# Altium PCB LPCB226R0.PcbDoc
Units mm, origin at the board's own origin, x right, y up, seen from the top; angles counter-clockwise.
Board outline 81.3 x 68 mm, 2 copper layers (Top Layer, Bottom Layer); 28 components, 6 nets, 77 pads, 60 vias.
Unrouted connection lines stored in the file: 61.
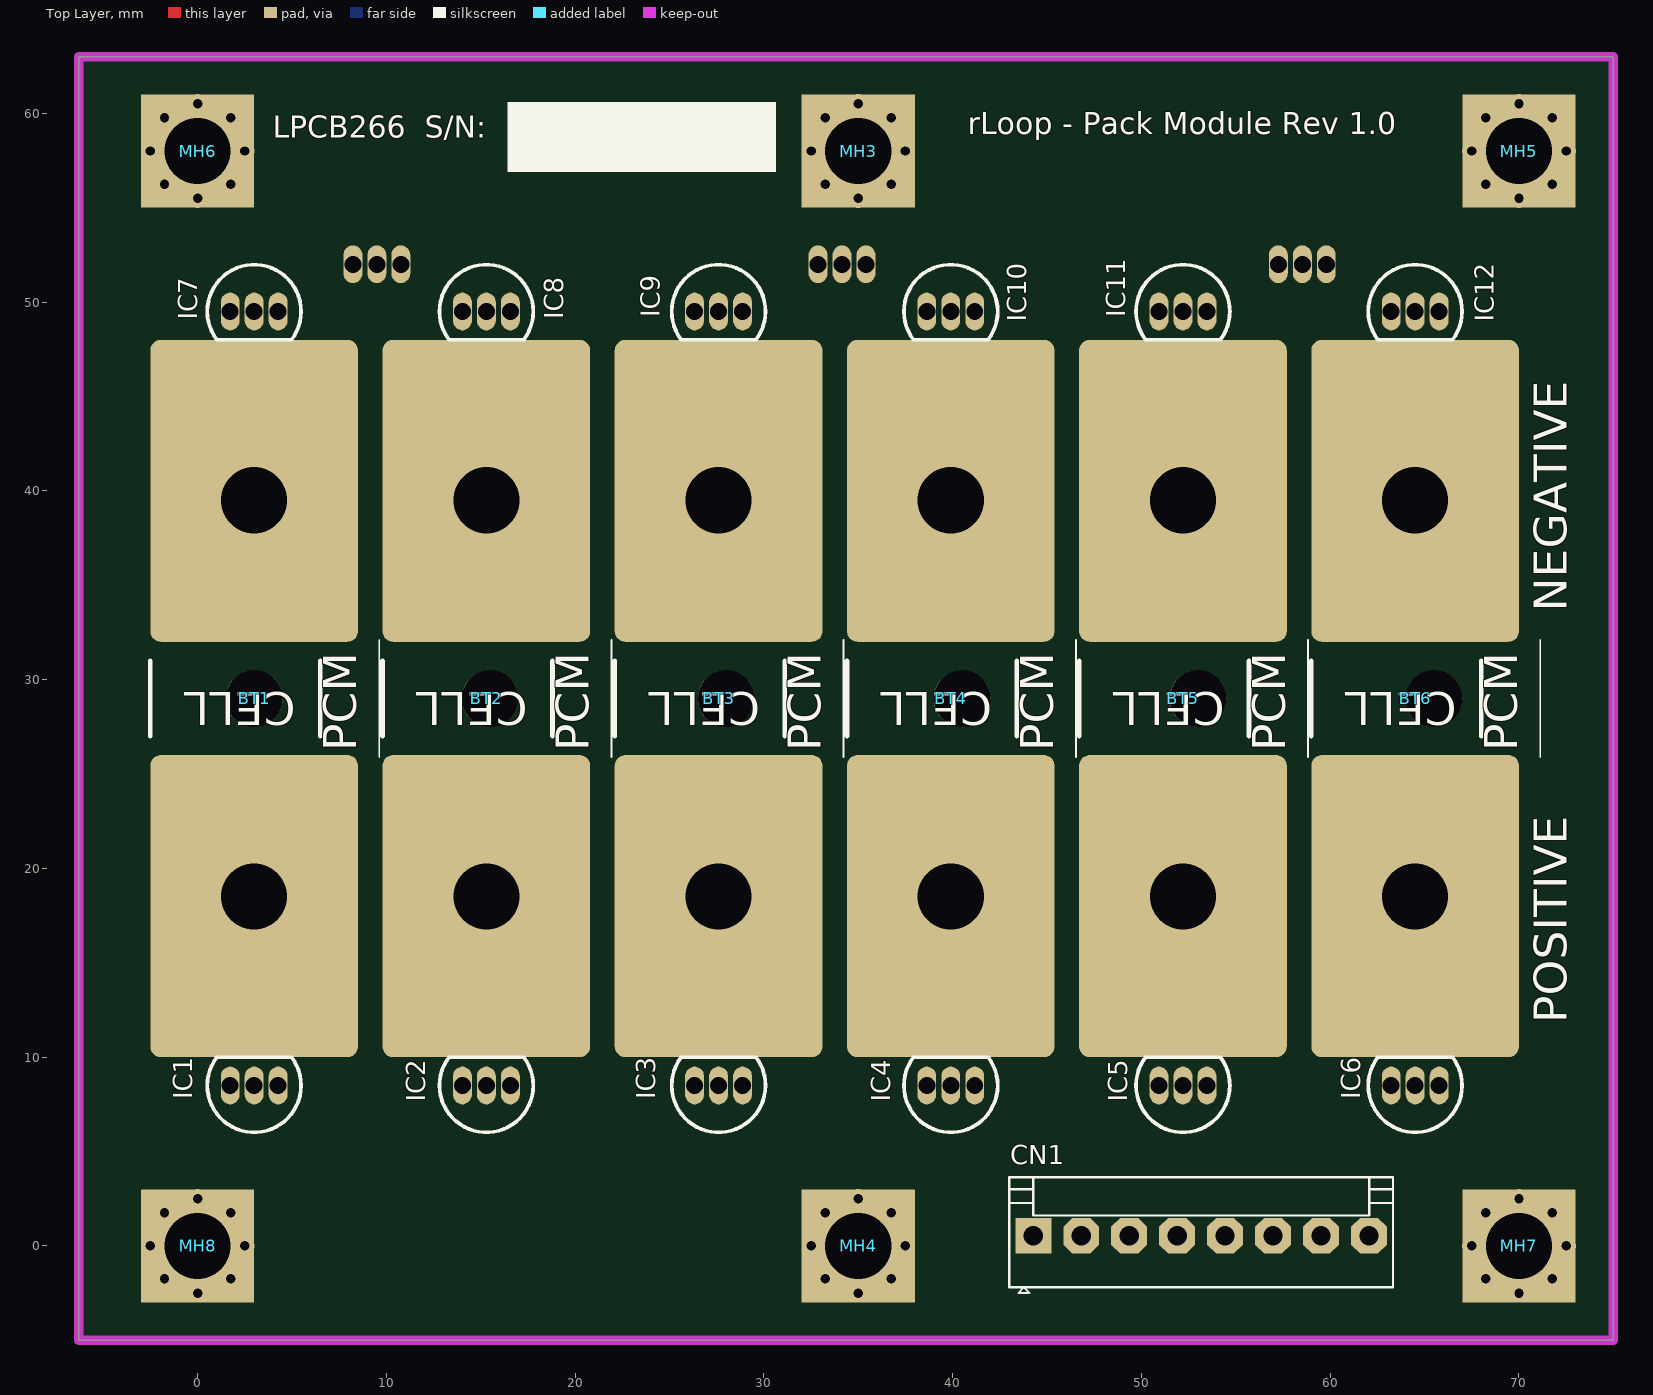
[diagram p0: Top Layer view]
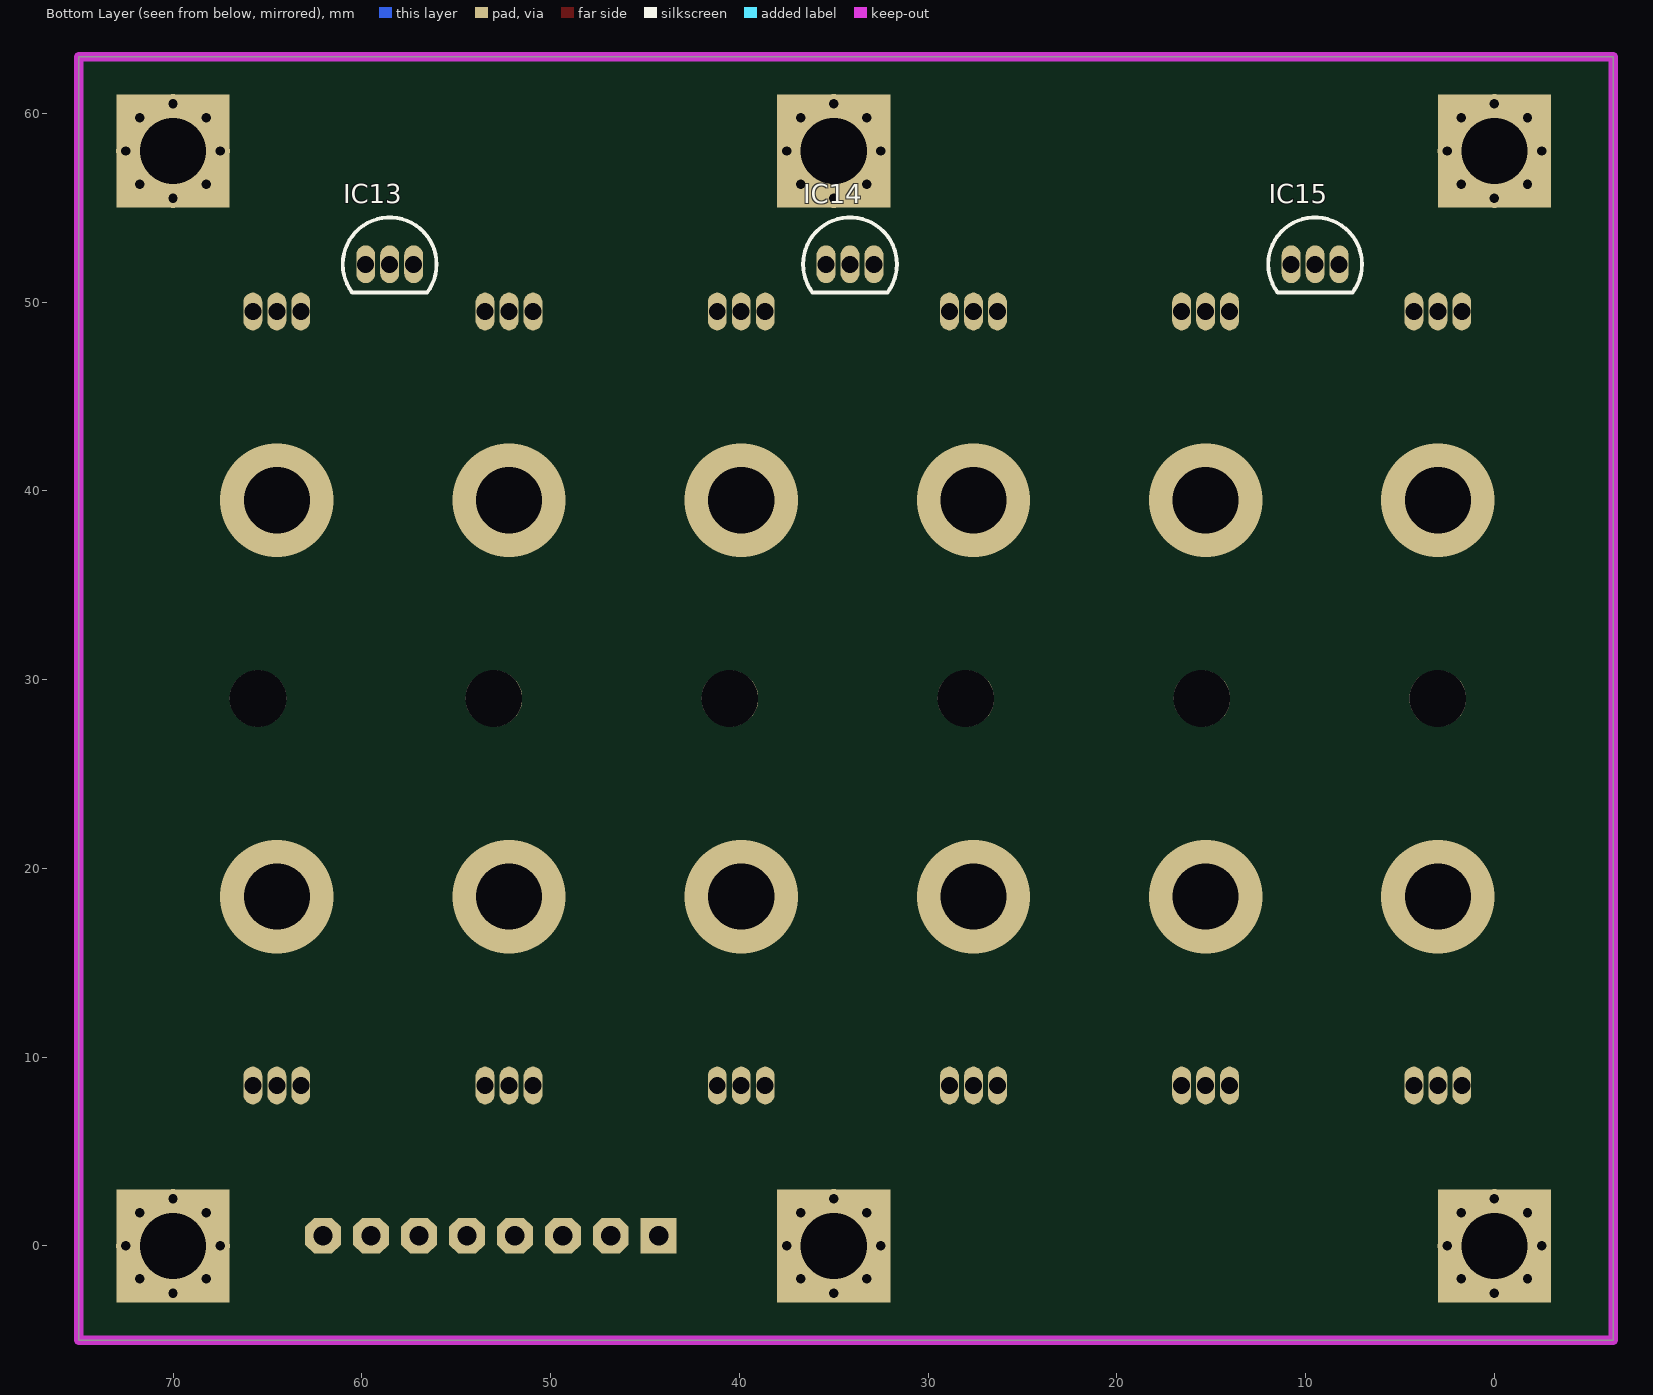
[diagram p1: Bottom Layer view, seen from below]

## Layer stack, top to bottom
Top Layer: signal copper 0.0356
Dielectric: dielectric 0.32, FR-4, Dk 4.8
Bottom Layer: signal copper 0.0356

## Board outline
-6.3,-5 75,-5 75,63 -6.3,63

## Design rules (kind name [scope] priority, off if disabled: settings)
Clearance [All] p1: gap=0.254
PolygonConnect [All] p1: connectstyle=Relief reliefconductorwidth=0.254 reliefentries=4 polygonreliefangle="90 Angle" airgapwidth=0.254
RoomDefinition "LPCB226 - TOP OVERVIEW" [InComponentClass('LPCB226 - TOP OVERVIEW')] p1: confinementstyle=ConfineIn formatcopy=TRUE lockcomponents=FALSE outline -66.976,-65.833 -16.176,-65.833 -16.176,-40.433 -66.976,-40.433
RoutingVias [All] p1: holewidth=0.711 width=1.27 viastyle="Through Hole" minholewidth=0.711 minwidth=1.27 maxholewidth=0.711 maxwidth=1.27
SolderMaskExpansion [All] p1: expansion=0.102
Width [All] p1: maxlimit=0.254 minlimit=0.254 preferedwidth=0.254
28 further rules are at their usual default settings.

## Components (designator, comment, footprint, x,y, rotation, side; value= is the part's Value field where it differs from the comment)
BT1 "YS50001SRL" YS50001SRL 3,29 r90 top
BT2 "YS50001SRL" YS50001SRL 15.3,29 r90 top
BT3 "YS50001SRL" YS50001SRL 27.6,29 r90 top
BT4 "YS50001SRL" YS50001SRL 39.9,29 r90 top
BT5 "YS50001SRL" YS50001SRL 52.2,29 r90 top
BT6 "YS50001SRL" YS50001SRL 64.5,29 r90 top
CN1 "640456-8" 640456-8 53.162,0.538 r0 top locked
IC1 "DS18B20+" TO-92A 3,8.5 r90 top locked
IC2 "DS18B20+" TO-92A 15.3,8.5 r90 top locked
IC3 "DS18B20+" TO-92A 27.6,8.5 r90 top locked
IC4 "DS18B20+" TO-92A 39.9,8.5 r90 top locked
IC5 "DS18B20+" TO-92A 52.2,8.5 r90 top locked
IC6 "DS18B20+" TO-92A 64.5,8.5 r90 top locked
IC7 "DS18B20+" TO-92A 3,49.5 r270 top locked
IC8 "DS18B20+" TO-92A 15.3,49.5 r270 top locked
IC9 "DS18B20+" TO-92A 27.6,49.5 r270 top locked
IC10 "DS18B20+" TO-92A 39.9,49.5 r270 top locked
IC11 "DS18B20+" TO-92A 52.2,49.5 r270 top locked
IC12 "DS18B20+" TO-92A 64.5,49.5 r270 top locked
IC13 "DS18B20+" TO-92A 58.522,52 r270 bottom locked
IC14 "DS18B20+" TO-92A 34.138,52 r270 bottom locked
IC15 "DS18B20+" TO-92A 9.5,52 r270 bottom locked
MH3 "MOUNTING_HOLE_3MM_SQ" MOUNTING_HOLE_3MM_SQ 35,58 r0 top
MH4 "MOUNTING_HOLE_3MM_SQ" MOUNTING_HOLE_3MM_SQ 35,0 r0 top
MH5 "MOUNTING_HOLE_3MM_SQ" MOUNTING_HOLE_3MM_SQ 70,58 r0 top
MH6 "MOUNTING_HOLE_3MM_SQ" MOUNTING_HOLE_3MM_SQ 0,58 r0 top
MH7 "MOUNTING_HOLE_3MM_SQ" MOUNTING_HOLE_3MM_SQ 70,0 r0 top
MH8 "MOUNTING_HOLE_3MM_SQ" MOUNTING_HOLE_3MM_SQ 0,0 r0 top

## Footprints (in the part's own frame and the unit in brackets; to place one, negate y for a bottom-side part, rotate by r counter-clockwise, add the part's x,y. Pads: shape width x height; smd on the part's side, far side on the other; paste and mask are expansions set on the pad)
640456-8 [mm] "Connector, Male Header, 8 Way"
  rect 1.905x1.905 hole 1.02: 1(-8.89,0)
  oct 1.905x1.905 hole 1.02: 2(-6.35,0) 3(-3.81,0) 4(-1.27,0) 5(1.27,0) 6(3.81,0) 7(6.35,0) 8(8.89,0)
  silkscreen extent -10.15,-3.04 10.17,3.1
MOUNTING_HOLE_3MM_SQ [mm] "Non-plated mounting hole for 3mm screw"
  rect 6x6 hole 3.5 mask+0.051: MOUNT(0,0)
TO-92A [mm] "TO, Flat Index; 3 In-Line, Axial Leads; Body Dia. 4.5mm; Leads 0.51 x 0.48 mm (max)"
  oval 2x1 hole 0.9: 1(0,-1.27) 2(0,0) 3(0,1.27)
  silkscreen extent -2.48,-2.48 1.5,2.48
YS50001SRL [mm]
  rrect10% 16x11 smd: N(11,0) P(-11,0)
  silkscreen extent -3.1,-6.63 3.1,5.5

## Part data
BT1 BT2 BT3 BT4 BT5 BT6: "Battery, LiPo"
CN1: "Connector, Male Header, 8 Way"
IC1 IC2 IC3 IC4 IC5 IC6 IC7 IC8 IC9 IC10 IC11 IC12 IC13 IC14 IC15: "IC, Temperature Sensor, 1 Wire, PTH"
MH3 MH4 MH5 MH6 MH7 MH8: "3MM Mouting Hole, Square"

## Free pads (board coordinates)
  round 3 hole 3 unplated: 0(3,29) 0(15.5,29) 0(28,29) 0(40.5,29) 0(53,29) 0(65.5,29)

## Via types
v1: diameter 1.016, hole 0.5, Top Layer to Bottom Layer, tented both sides, 48 vias
v2: diameter 6, hole 3.5, Top Layer to Bottom Layer, 12 vias

## Nets (pads, with @x,y where several pads share a name; then routed paths per layer and width w, separated by ;. In a path a pad name is that pad's centre, name@x,y a point inside that pad or via, vN(x,y) a via of type N, cw(c..) or ccw(c..) an arc to the next point about the centre after c; other vN are vias at no path point)
CHASSIS_GND: MH3.MOUNT MH4.MOUNT MH5.MOUNT MH6.MOUNT MH7.MOUNT MH8.MOUNT
  other v1: 0,-2.5 35,-2.5 70,-2.5 -1.75,-1.75 1.75,-1.75 33.25,-1.75 36.75,-1.75 68.25,-1.75 71.75,-1.75 -2.5,0 2.5,0 32.5,0 37.5,0 67.5,0 72.5,0 -1.75,1.75 1.75,1.75 33.25,1.75 36.75,1.75 68.25,1.75 71.75,1.75 0,2.5 35,2.5 70,2.5 0,55.5 35,55.5 70,55.5 -1.75,56.25 1.75,56.25 33.25,56.25 36.75,56.25 68.25,56.25 71.75,56.25 -2.5,58 2.5,58 32.5,58 37.5,58 67.5,58 72.5,58 -1.75,59.75 1.75,59.75 33.25,59.75 36.75,59.75 68.25,59.75 71.75,59.75 0,60.5 35,60.5 70,60.5
D3V3: CN1.6 IC1.3 IC2.3 IC3.3 IC4.3 IC5.3 IC6.3 IC7.3 IC8.3 IC9.3 IC10.3 IC11.3 IC12.3 IC13.3 IC14.3 IC15.3
DGND: CN1.7 IC1.1 IC2.1 IC3.1 IC4.1 IC5.1 IC6.1 IC7.1 IC8.1 IC9.1 IC10.1 IC11.1 IC12.1 IC13.1 IC14.1 IC15.1
DS_BUS: CN1.8 IC1.2 IC2.2 IC3.2 IC4.2 IC5.2 IC6.2 IC7.2 IC8.2 IC9.2 IC10.2 IC11.2 IC12.2 IC13.2 IC14.2 IC15.2
P3V7: BT1.P BT2.P BT3.P BT4.P BT5.P BT6.P
  other v2: 15.3,18.5 27.6,18.5 39.9,18.5 52.2,18.5 64.5,18.5
PGND: BT1.N BT2.N BT3.N BT4.N BT5.N BT6.N
  other v2: 3,18.5 3,39.5 15.3,39.5 27.6,39.5 39.9,39.5 52.2,39.5 64.5,39.5
pads on no net: CN1.1 CN1.2 CN1.3 CN1.4 CN1.5

## Keep-outs
Keep-Out Layer:
  the board outline again, w0.5

## Silkscreen, mask and mechanical layers (free items; w line width, h text height)
Top Overlay:
  rectangle: 16.427,56.9 30.651,60.583
  text "rLoop - Pack Module Rev 1.0" at 40.8,58.5 h2
  text "LPCB266  S/N:" at 3.981,58.297 h2
  text "NEGATIVE" at 73.1,33.6 h3 r90
  text "POSITIVE" at 73.1,11.8 h3 r90
Mechanical 1:
  the board outline again, w0.1

## Text inside footprints (layer, text, board x,y; h text height)
BT1: Top Overlay "CELL" at 5.2,29.9 h3 r180; Top Overlay "PCM" at 9,26.2 h3 r90
BT2: Top Overlay "PCM" at 21.3,26.2 h3 r90; Top Overlay "CELL" at 17.5,29.9 h3 r180
BT3: Top Overlay "CELL" at 29.8,29.9 h3 r180; Top Overlay "PCM" at 33.6,26.2 h3 r90
BT4: Top Overlay "PCM" at 45.9,26.2 h3 r90; Top Overlay "CELL" at 42.1,29.9 h3 r180
BT5: Top Overlay "CELL" at 54.4,29.9 h3 r180; Top Overlay "PCM" at 58.2,26.2 h3 r90
BT6: Top Overlay "PCM" at 70.5,26.2 h3 r90; Top Overlay "CELL" at 66.7,29.9 h3 r180